# Allegro board CHOPPINGWAVEOSC.brd
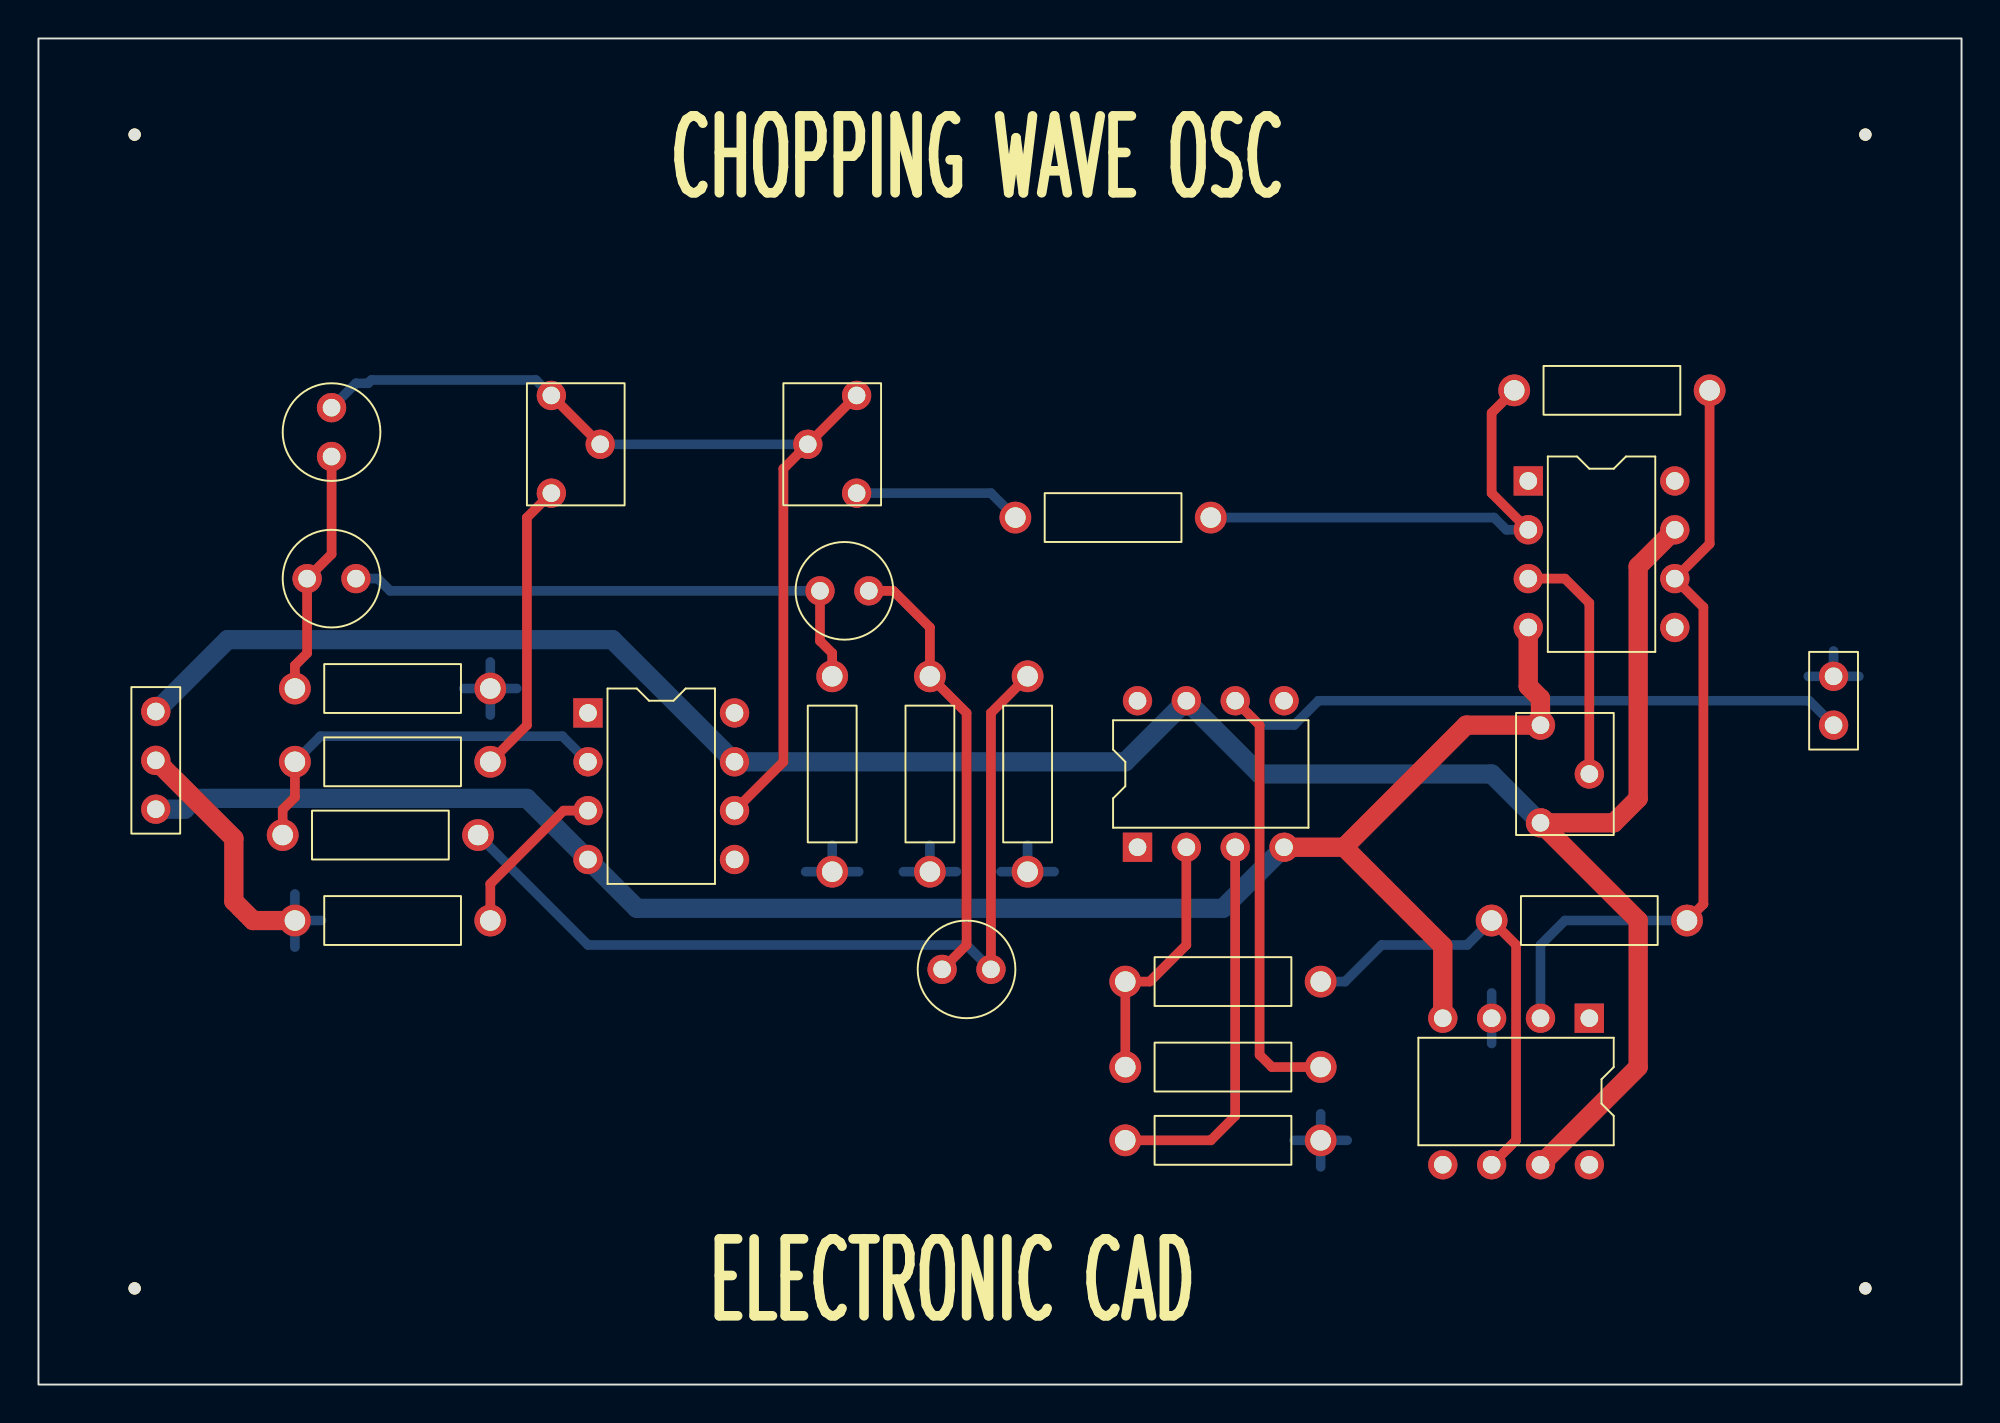
[diagram p0: board, top side]
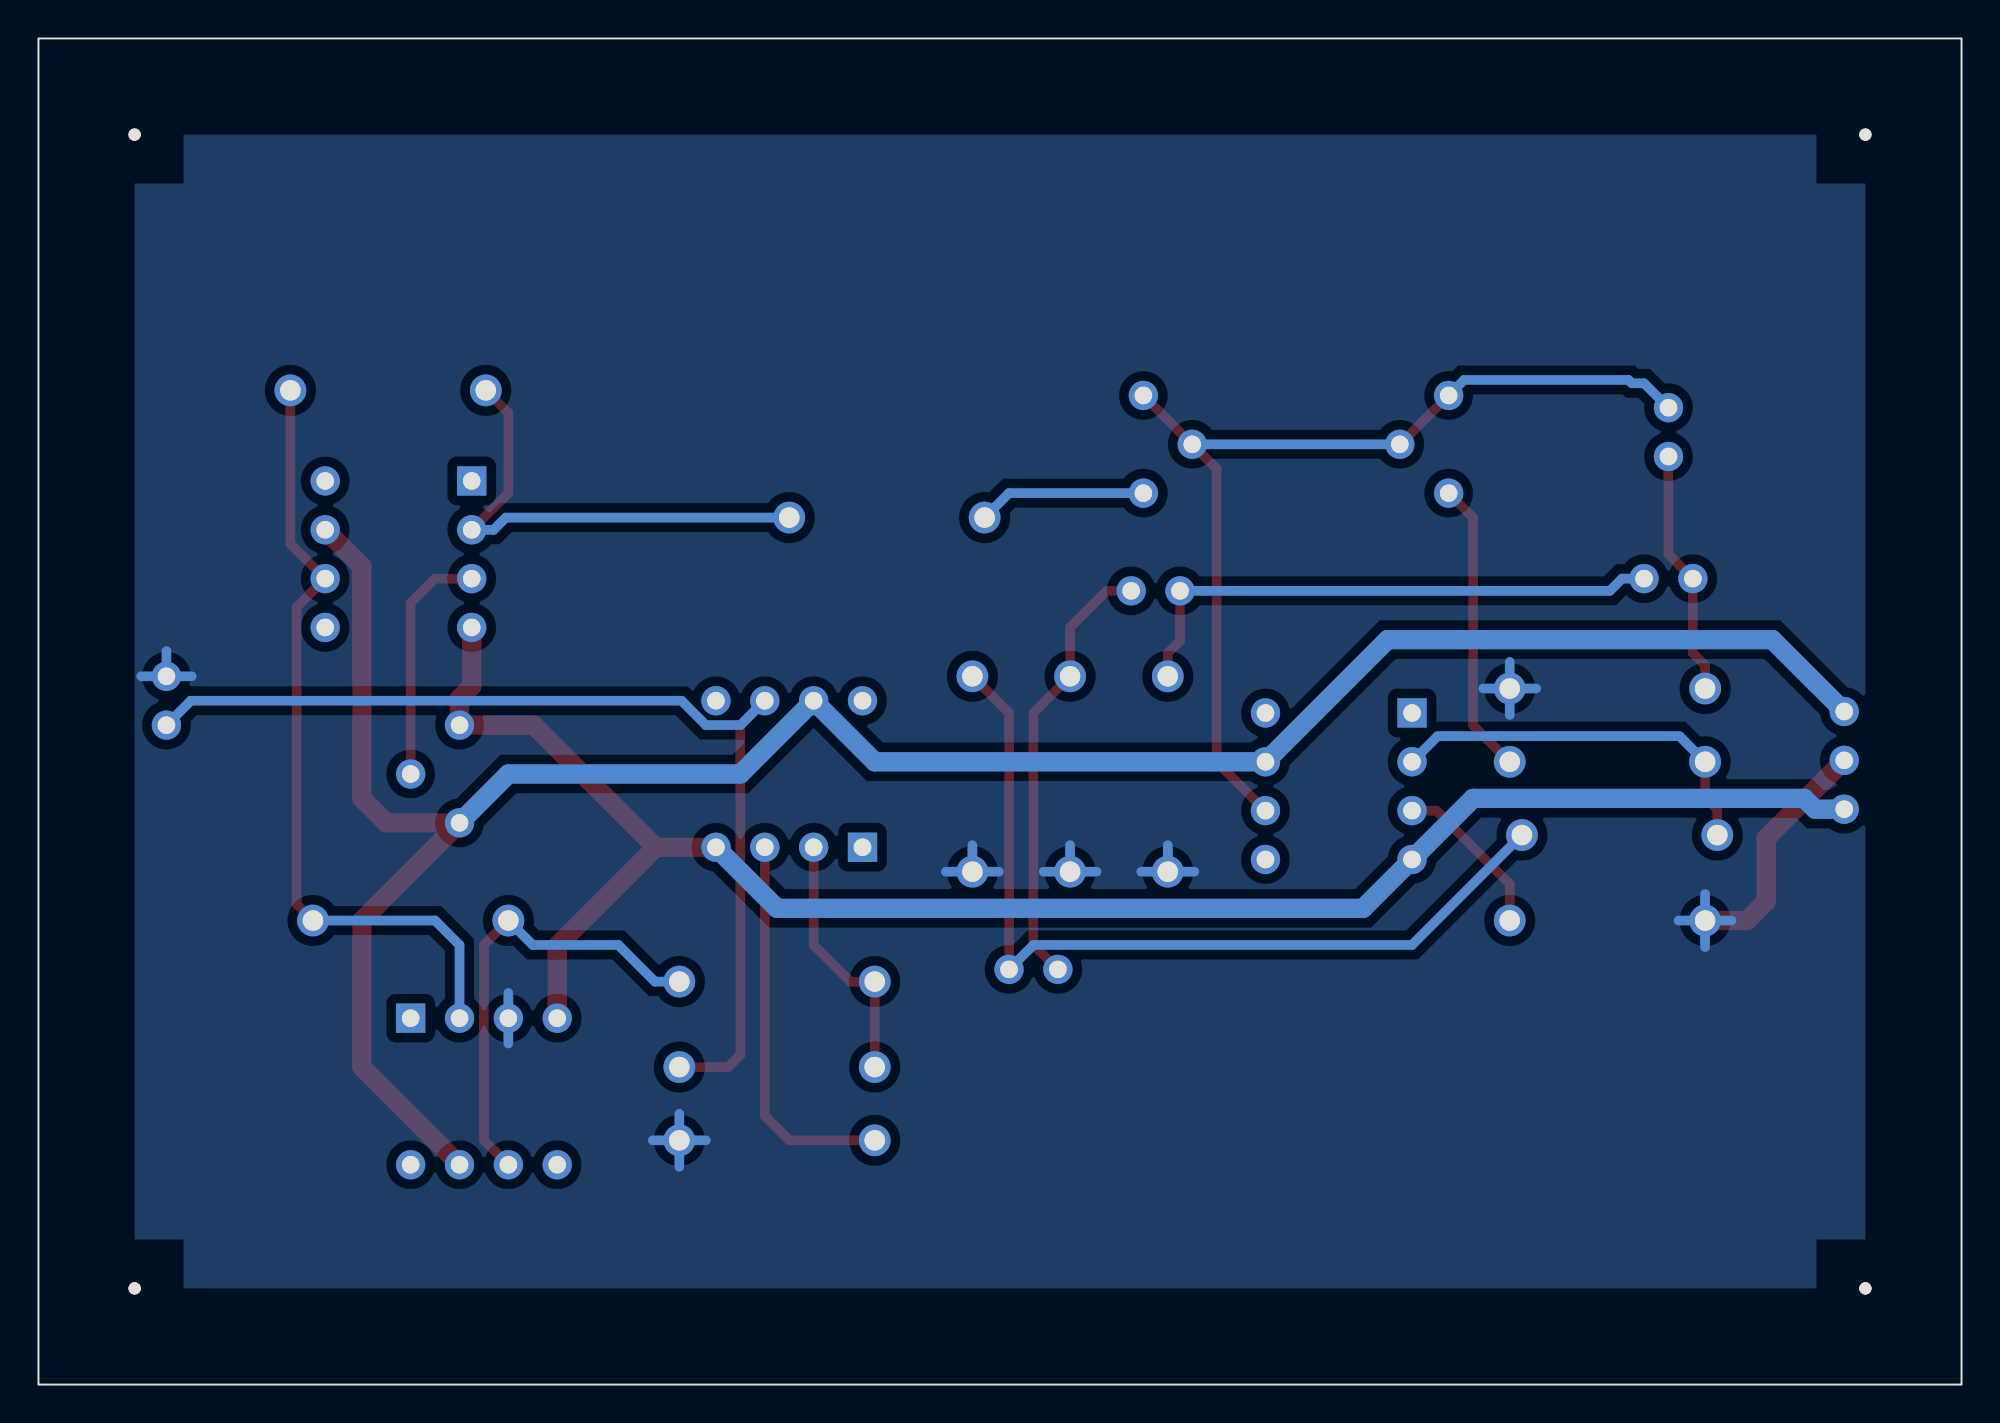
[diagram p1: board, bottom side, seen from below]

Outline 100 x 70 mm; copper layers: TOP, BOTTOM. Coordinates in mm from the lower left corner of the outline.
Outline path: rectangle 0,0 100,70

## Design rules (mm)
constraint set DEFAULT: min track width 0.5

## Placement (name value [footprint] x y rotation side)
C1  0.001uF  [CAP196]  15.24 48.26 0 top
C2  0.001uF  [CAP196]  13.97 41.91 270 top
C3  0.001uF  [CAP196]  43.18 41.27 90 top
C4  0.001uF  [CAP196]  49.53 21.59 90 top
J1  CON3  [JUMPER3]  6.1 35 270 top
J2  CON2  [JUMPER2]  93.34 34.29 90 top
NOREF  -  []  100 0 90 top
NOREF#2  -  [unnamed#2]  95 5 0 top
NOREF#3  -  []  0 70 0 top
NOREF#4  -  [unnamed#2]  95 65 0 top
NOREF#5  -  [unnamed#2]  5 65 0 top
NOREF#6  -  [unnamed#2]  5 5 0 top
R1  10K  [RES400]  86.9 51.7 90 top
R2  15K  [RES400]  23.5 32.38 90 top
R3  10K  [RES400]  22.86 28.57 90 top
R4  20K  [RES400]  60.96 45.09 90 top
R5  4.7K  [RES400]  23.5 36.2 90 top
R6  4.7K  [RES400]  41.27 26.67 0 top
R7  4.7K  [RES400]  46.35 26.67 0 top
R8  4.7K  [RES400]  51.44 26.67 0 top
R9  1K  [RES400]  13.34 24.13 270 top
R10  8.2K  [RES400]  85.72 24.13 90 top
R11  10K  [RES400]  56.52 16.51 270 top
R12  2.2K  [RES400]  66.67 20.95 90 top
R13  5.1K  [RES400]  66.67 12.7 90 top
U1  LF356  [DIP8_3]  28.57 34.92 0 top
U2  LF356  [DIP8_3]  77.47 46.99 0 top
U3  LF356  [DIP8_3]  80.64 19.05 270 top
U4  LF356  [DIP8_3]  57.15 27.94 90 top
VR1  470K  [RESADJ]  26.67 46.35 180 top
VR2  100K  [RESADJ]  42.55 51.44 0 top
VR3  10K  [RESADJ]  78.11 29.21 180 top

## Library data of the parts
C1-C4 = C: Tolerance: ***; User Part Number: ***
J1 = CON3_0: User Part Number: ***
J2 = CON2: User Part Number: ***
R1-R13 = R: Tolerance: ***; User Part Number: ***
U1-U4 = LF356_4: Tolerance: ***; User Part Number: ***
VR1-VR3 = POT: Tolerance: ***; User Part Number: ***

## Footprints (pads in the part's own frame, mm; a bottom-side part is the same pattern mirrored in y, then rotated)
CAP196
  round 1.524 hole 0.914: 1(0,0) 2(0,2.54)
DIP8_3
  rect 1.524x1.524 hole 0.914: 1(0,0)
  round 1.524 hole 0.914: 2(0,-2.54) 3(0,-5.08) 4(0,-7.62) 5(7.62,-7.62) 6(7.62,-5.08) 7(7.62,-2.54) 8(7.62,0)
JUMPER2
  round 1.524 hole 0.914: 1(0,0) 2(2.54,0)
JUMPER3
  round 1.524 hole 0.914: 1(0,0) 2(2.54,0) 3(5.08,0)
RES400
  round 1.651 hole 1.067: 1(0,0) 2(0,10.16)
RESADJ
  round 1.524 hole 0.914: 1(0,0) 2(-2.54,-2.54) 3(0,-5.08)
unnamed#2
  round 0.635 hole 3.175 unplated: (0,0)

## Nets
+12V: J1.1 U1.7 U2.7 U3.7 U4.7 VR3.1
-12V: J1.3 U1.4(V-) U2.4(V-) U3.4(V-) U4.4(V-) VR3.3
GND: J1.2 J2.2 R5.1 R6.1 R7.1 R8.1 R9.1 R13.1 U3.3
OUT: J2.1 R11.2 U4.6
SIG: R1.1 R10.1 U2.6 U3.2
N01266: R11.1 R12.2 U4.2
N01287: R13.2 U4.3
N01345: R10.2 R12.1 U3.6
N01432: C1.1 C2.1 R5.2
N01446: C2.2 C3.2 R6.2
N01460: C3.1 C4.2 R7.2
N01483: C4.1 R3.1 R8.2
N01513: R2.2 R3.2 U1.2
N01542: R2.1 VR1.1
N01556: R9.2 U1.3
N01579: C1.2 U1.6 VR1.2(WIPER) VR1.3 VR2.1 VR2.2(WIPER)
N01674: R4.2 VR2.3
N01694: R1.2 R4.1 U2.2
N01698: U2.3 VR3.2(WIPER)

Pads without a net: U1 1 5 8; U2 1 5 8; U3 1 5 8; U4 1 5 8

## Routing (per net, layer and track width the routed paths; a pad name or vN(x,y) marks a point on that pad's centre or on a via; arc(x,y) is an arc through that point)
+12V: length 122.5
  TOP w1: U3.7 83.19,16.51 83.19,24.13 VR3.1 81.92,29.21 83.19,30.48 83.19,42.55 U2.7
  BOTTOM w1: VR3.1 75.56,31.75 63.5,31.75 U4.7 56.52,32.38 U1.7 29.84,38.73 9.84,38.73 J1.1
-12V: length 94.9
  TOP w1: 67.89,27.94 74.24,34.29 VR3.3 78.11,35.68 77.47,36.31 U2.4 ; 67.89,27.94 73.03,22.81 U3.4 ; 67.89,27.94 U4.4
  BOTTOM w1: U4.4 61.59,24.77 31.11,24.77 U1.4 25.4,30.48 8.18,30.48 7.62,29.92 J1.3
GND: length 48.1
  TOP w1: R9.1 11.16,24.13 10.16,25.13 10.16,28.4 J1.2
  BOTTOM w0.5: R7.1 47.73,26.67 ; R7.1 46.35,28.05 ; R7.1 44.98,26.67 ; R5.1 24.87,36.2 ; R5.1 23.5,34.82 ; R5.1 22.12,36.2 ; R5.1 23.5,37.57 ; 50.06,26.67 R8.1 ; R8.1 52.81,26.67 ; R8.1 51.44,28.05 ; 65.3,12.7 R13.1 ; R13.1 66.67,11.32 ; R13.1 68.05,12.7 ; R13.1 66.67,14.08 ; 92.03,36.83 J2.2 ; J2.2 94.66,36.83 ; J2.2 93.34,38.15 ; 11.96,24.13 R9.1 ; R9.1 13.34,22.75 ; R9.1 13.34,25.51 ; R9.1 14.71,24.13 ; R6.1 42.65,26.67 ; R6.1 39.9,26.67 ; R6.1 41.27,28.05 ; 75.56,17.73 U3.3 75.56,20.36
OUT: length 55.1
  TOP w0.5: R11.2 64.14,16.51 63.5,17.14 63.5,34.29 U4.6
  BOTTOM w0.5: U4.6 63.5,34.29 65.3,34.29 66.56,35.56 92.08,35.56 J2.1
SIG: length 41.2
  TOP w0.5: R1.1 86.9,43.72 U2.6 86.58,40.42 86.58,24.98 R10.1
  BOTTOM w0.5: U3.2 78.11,22.86 79.38,24.13 R10.1
N01266: length 13.5
  TOP w0.5: R11.1 R12.2 57.79,20.95 59.69,22.86 U4.2
N01287: length 20.2
  TOP w0.5: U4.3 62.23,13.97 60.96,12.7 R13.2
N01345: length 24
  TOP w0.5: R10.2 76.83,22.86 76.83,12.7 U3.6
  BOTTOM w0.5: R12.1 67.94,20.95 69.85,22.86 74.3,22.86 R10.2
N01432: length 12.9
  TOP w0.5: C1.1 15.24,43.18 C2.1 13.97,38.03 13.34,37.4 R5.2
N01446: length 29.1
  TOP w0.5: C3.2 40.64,38.67 41.27,38.03 R6.2
  BOTTOM w0.5: C3.2 18.29,41.27 17.65,41.91 C2.2
N01460: length 23.1
  TOP w0.5: C3.1 44.45,41.27 46.35,39.37 R7.2 48.26,34.92 48.26,22.86 C4.2
N01483: length 45.6
  TOP w0.5: R8.2 49.53,34.92 C4.1
  BOTTOM w0.5: R3.1 28.57,22.86 48.26,22.86 C4.1
N01513: length 20.4
  TOP w0.5: R2.2 13.34,30.54 12.7,29.91 R3.2
  BOTTOM w0.5: R2.2 14.66,33.72 27.25,33.72 U1.2
N01542: length 15.3
  TOP w0.5: VR1.1 25.4,45.09 25.4,34.29 R2.1
N01556: length 8.6
  TOP w0.5: U1.3 27.3,29.84 23.5,26.04 R9.2
N01579: length 51
  TOP w0.5: U1.6 38.73,32.38 38.73,47.62 VR2.2 VR2.1 ; 26.67,51.44 29.21,48.9
  BOTTOM w0.5: 26.67,51.44 25.86,52.24 17.32,52.24 17.14,52.07 16.51,52.07 C1.2 ; 29.21,48.9 VR2.2
N01674: length 8.8
  BOTTOM w0.5: R4.2 49.53,46.35 VR2.3
N01694: length 25.3
  TOP w0.5: R1.2 75.56,50.52 75.56,46.35 U2.2
  BOTTOM w0.5: U2.2 76.33,44.45 75.69,45.09 R4.1
N01698: length 12.6
  TOP w0.5: 80.64,31.75 80.64,40.64 79.38,41.91 U2.3

## Copper pours and planes (outline as drawn; the poured copper is in the pictures)
GND on BOTTOM: 5,5 5,65 95,65 95,5 ; 3 cut-outs

## Text on the board
Ref Des/Silkscreen Top: CHOPPING WAVE OSC | ELECTRONIC CAD
DIMENSION: FIGURE | FINISHED_SIZE | 0.914 | 1.067 | 3.175 | DRILL CHART: TOP to BOTTOM | ALL UNITS ARE IN MILLIMETERS | PLATED | NON-PLATED | QTY | 54 | 26 | 4
